# Altium PCB Array_02.PcbDoc
Units mil, origin at the board's own origin, x right, y up, seen from the top; angles counter-clockwise.
Board outline 6691.9 x 3175.2 mil, 2 copper layers (Top Layer, Bottom Layer); 36 components, 46 nets, 161 pads, 25 vias.
Unrouted connection lines stored in the file: 4.
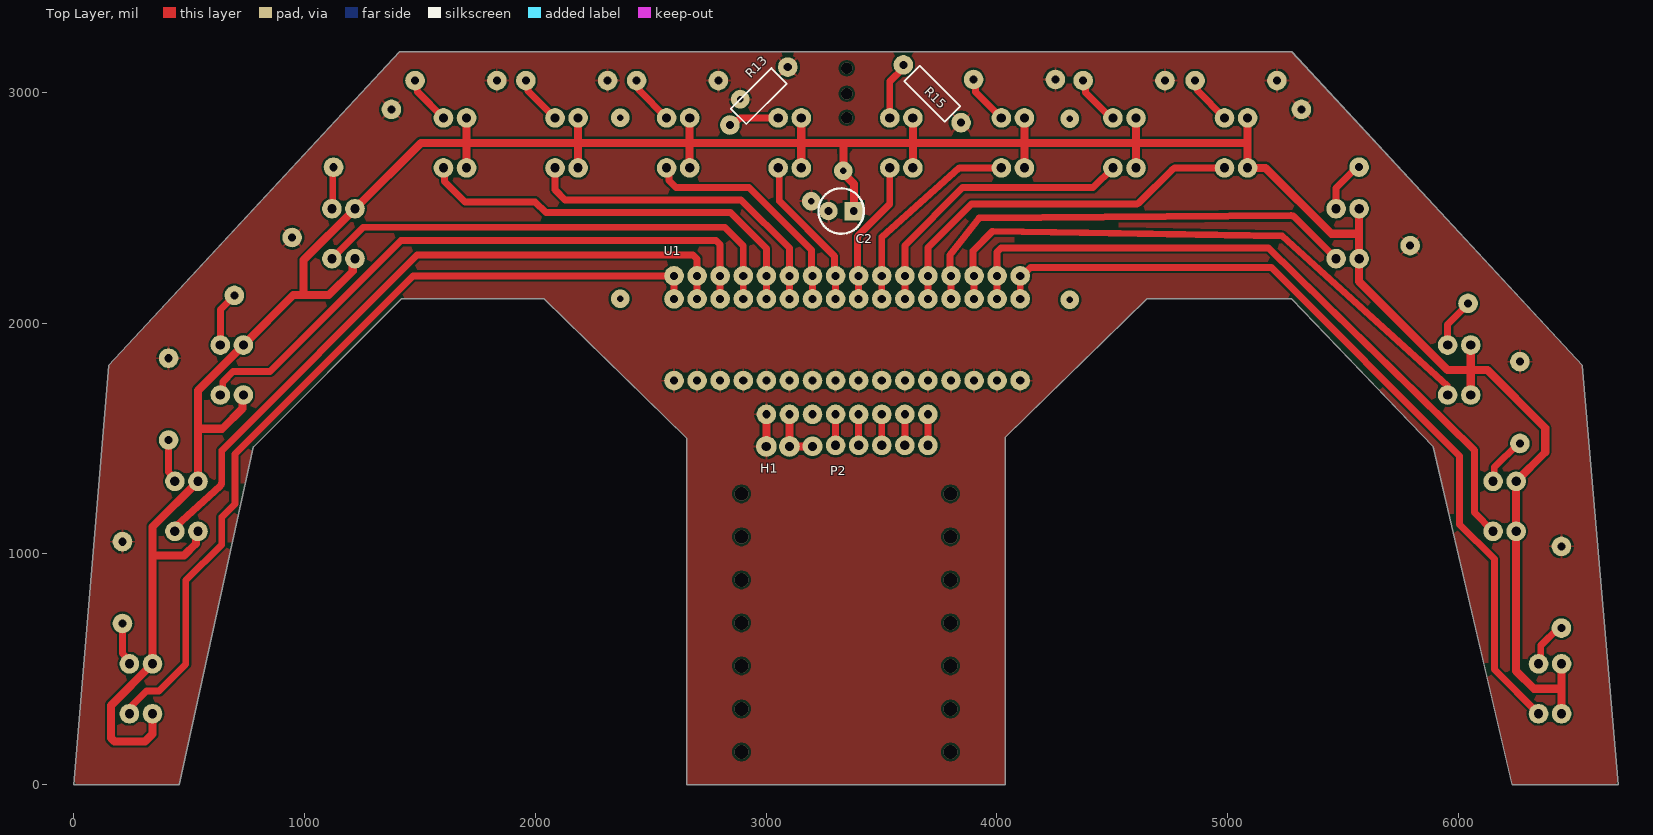
[diagram p0: Top Layer view]
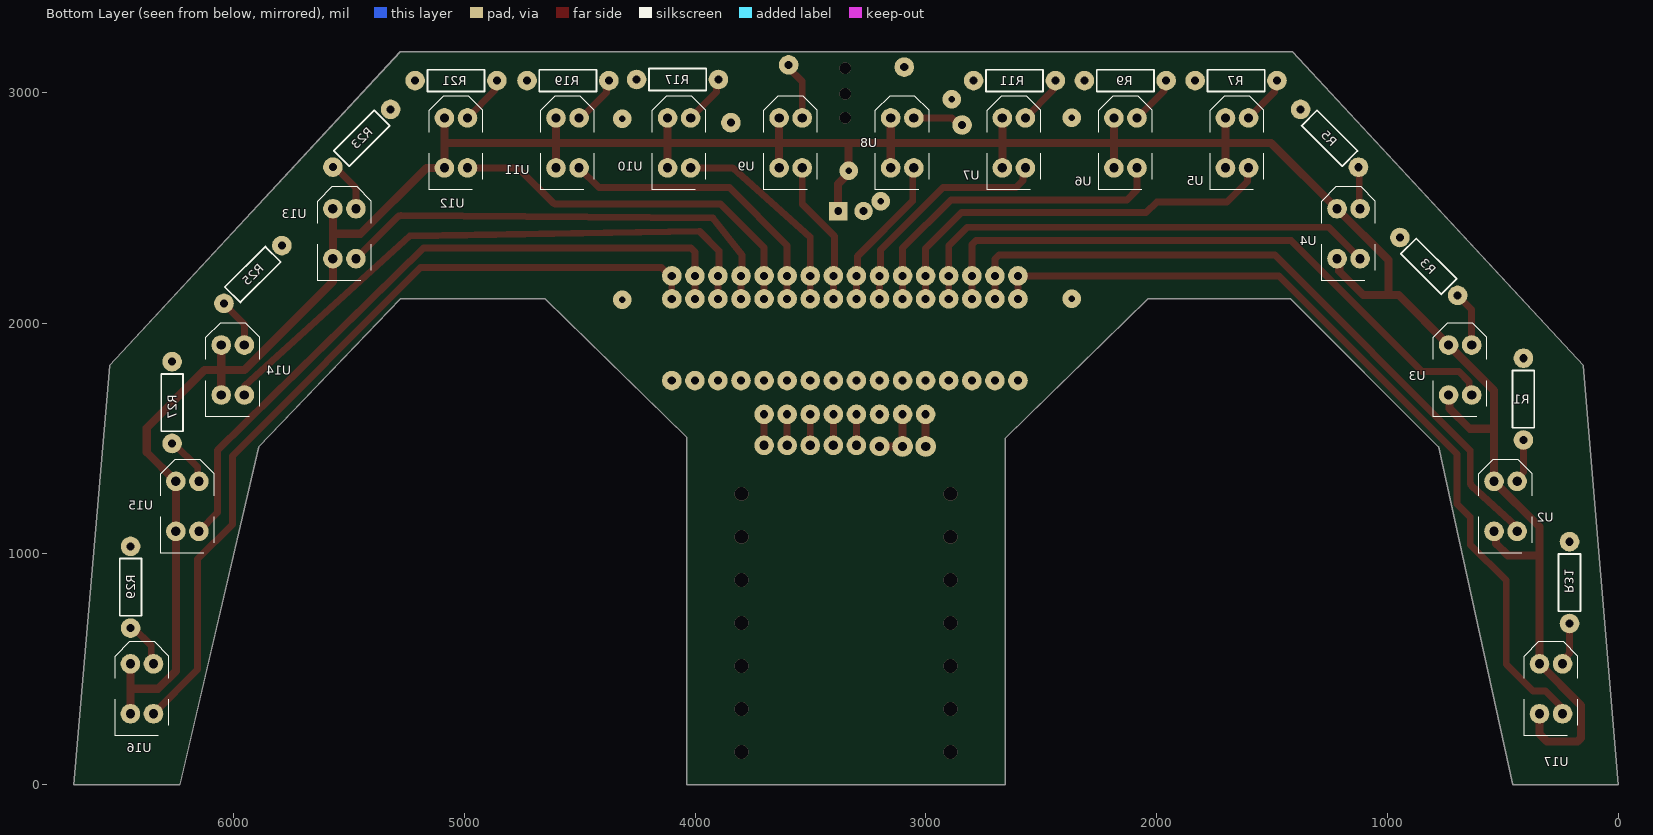
[diagram p1: Bottom Layer view, seen from below]
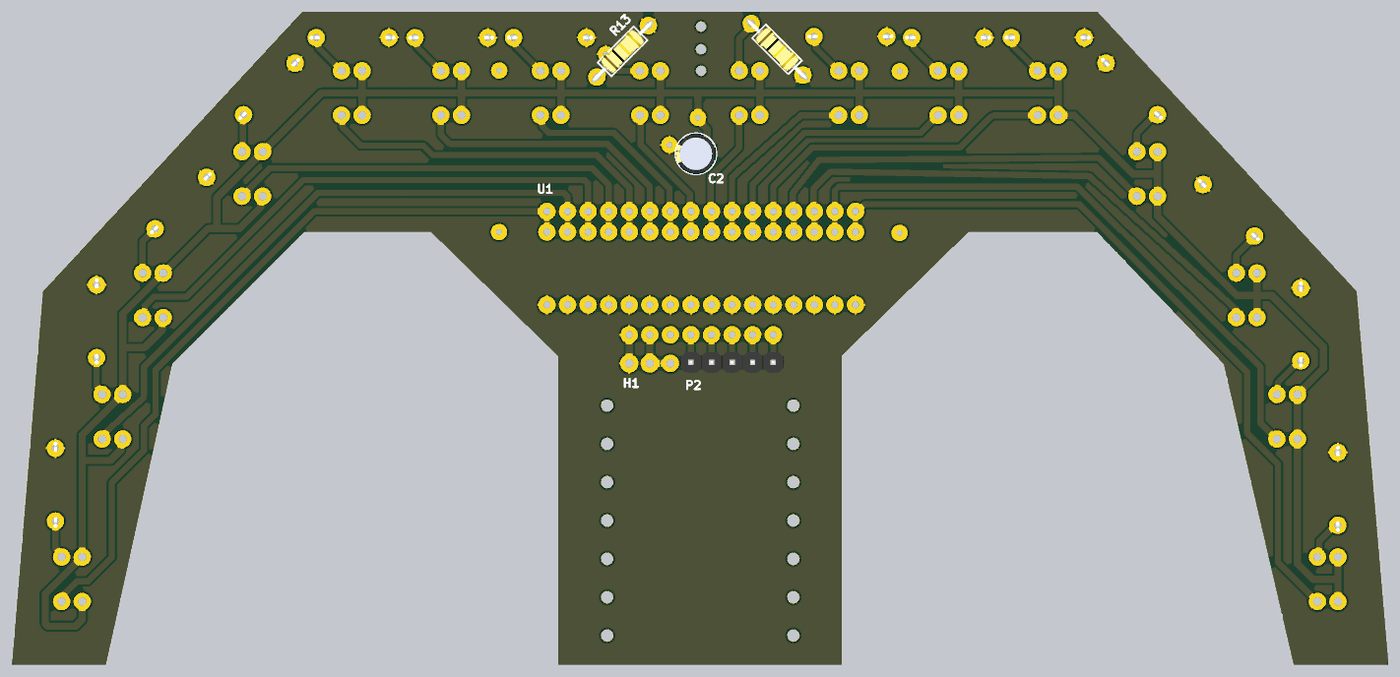
[diagram p2: 3D render of the assembled board from above, using the file's embedded part models]

## Layer stack, top to bottom
Top Solder: solder mask 0.4, Solder Resist, Dk 3.5
Top Layer: signal copper 1.4
Dielectric 1: dielectric 12.6, FR-4, Dk 4.8
Bottom Layer: signal copper 1.4
Bottom Solder: solder mask 0.4, Solder Resist, Dk 3.5

## Board outline
2655,-0.02 2655,1501.74 2037.84,2104.79 1420.37,2105.04 778.5,1463.17 456.03,-0.02 -0.01,-0.02 150.84,1815.19 1410.84,3175.19 5276.89,3175.19 6536.89,1815.19 6691.89,-0.02 6231.69,-0.02 5891.45,1463.17 5275.84,2104.96 4650.06,2104.96 4034.91,1503.87 4034.91,-0.02

## Design rules (kind name [scope] priority, off if disabled: settings)
Clearance Clearance_1 [InNamedPolygon('NONET_L01_P000')] p1: gap=10 ignorepadtopadclearanceinfootprint=FALSE
Clearance [All] p2: gap=10 ignorepadtopadclearanceinfootprint=TRUE except(15: Arc-Arc Arc-Track Track-Track)
PolygonConnect PolygonConnect_4 [All vs IsNamedPolygon('NONET_L01_P001')] p1: thpad.connectstyle=Direct thpad.reliefconductorwidth=10 thpad.reliefentries=4 thpad.polygonreliefangle="90 Angle" thpad.airgapwidth=10 smdpad.connectstyle=Direct smdpad.reliefconductorwidth=10 smdpad.reliefentries=4 smdpad.polygonreliefangle="90 Angle" smdpad.airgapwidth=10 via.connectstyle=Relief via.reliefconductorwidth=10 via.reliefentries=4 via.polygonreliefangle="90 Angle" via.airgapwidth=10
PolygonConnect PolygonConnect_3 [All vs IsNamedPolygon('NONET_L01_P000')] p2: thpad.connectstyle=Direct thpad.reliefconductorwidth=10 thpad.reliefentries=4 thpad.polygonreliefangle="90 Angle" thpad.airgapwidth=10 smdpad.connectstyle=Relief smdpad.reliefconductorwidth=10 smdpad.reliefentries=4 smdpad.polygonreliefangle="90 Angle" smdpad.airgapwidth=10 via.connectstyle=Relief via.reliefconductorwidth=10 via.reliefentries=4 via.polygonreliefangle="90 Angle" via.airgapwidth=10
PolygonConnect PolygonConnect_2 [All vs IsNamedPolygon('NONET_L-01_P-001')] p3: connectstyle=Direct reliefconductorwidth=10 reliefentries=4 polygonreliefangle="90 Angle" airgapwidth=10
PolygonConnect PolygonConnect_1 [All vs IsNamedPolygon('NONET_L01_P001')] p4: connectstyle=Direct reliefconductorwidth=10 reliefentries=4 polygonreliefangle="90 Angle" airgapwidth=10
PolygonConnect c1 [All vs IsNamedPolygon('NONET_L01_P000')] p5: connectstyle=Relief reliefconductorwidth=25 reliefentries=4 polygonreliefangle="90 Angle" airgapwidth=10
PolygonConnect [All] p6: connectstyle=Relief reliefconductorwidth=10 reliefentries=4 polygonreliefangle="90 Angle" airgapwidth=10
RoutingVias [All] p1: holewidth=28 width=50 viastyle="Through Hole" minholewidth=28 minwidth=50 maxholewidth=28 maxwidth=50
SolderMaskExpansion [All] p1: expansion=4 istentingtop=FALSE
SupplyNets "Schematic Supply Nets_3" [InNet('S VCC')] p1: voltage=0.000
SupplyNets "Schematic Supply Nets_2" [InNet('GND')] p2: voltage=0.000
SupplyNets "Schematic Supply Nets" [InNet('+5')] p3: voltage=0.000
Width [All] p1: maxlimit=60 minlimit=20 preferedwidth=35 minimp=50.000000 maximp=50.000000 favimp=50.000000
30 further rules are at their usual default settings.

## Components (designator, comment, footprint, x,y, rotation, side; value= is the part's Value field where it differs from the comment)
C2 "100uF 16V" "100uF  16V" 3325,2485 r180 top
H1 "Header 1x3" "Header 1x2 male CNC" 3100.84,1465.19 r0 top
P2 "Header 1x5" "Header 1x5 male" 3500.84,1470.19 r180 top
R1 "220" "1/4W resistor TH CNC" 410.84,1670.19 r270 bottom locked
R3 "220" "1/4W resistor TH CNC" 820.84,2245.19 r225 bottom
R5 "220" "1/4W resistor TH CNC" 1250.84,2800.19 r225 bottom locked
R7 "220" "1/4W resistor TH CNC" 1655.84,3050.19 r180 bottom locked
R9 "220" "1/4W resistor TH CNC" 2135.84,3050.19 r180 bottom locked
R11 "220" "1/4W resistor TH CNC" 2615.84,3050.19 r180 bottom locked
R13 "220" "1/4W resistor TH CNC" 2968.27,2983.29 r225 top
R15 "220" "1/4W resistor TH CNC" 3719.45,2993.14 r135 top
R17 "220" "1/4W resistor TH CNC" 4075.84,3055.19 r180 bottom locked
R19 "220" "1/4W resistor TH CNC" 4550.84,3050.19 r180 bottom locked
R21 "220" "1/4W resistor TH CNC" 5035.84,3050.19 r180 bottom locked
R23 "220" "1/4W resistor TH CNC" 5444.17,2800.46 r315 bottom
R25 "220" "1/4W resistor TH CNC" 5915.84,2210.19 r315 bottom
R27 "220" "1/4W resistor TH CNC" 6265.84,1655.19 r270 bottom
R29 "220" "1/4W resistor TH CNC" 6445.84,855.19 r270 bottom
R31 "220" "1/4W resistor TH CNC" 210.84,875.19 r270 bottom locked
U1 "16:1 Mux" "Mux 16Ch 74HC4067 Module" 3350.84,2204.52 r270 top
U2 "TCRT5000" OPTO_TCRT5000 487.96,1205.74 r90 bottom locked
U3 "TCRT5000" OPTO_TCRT5000 684.81,1796.29 r90 bottom locked
U4 "TCRT5000" OPTO_TCRT5000 1168.27,2386.84 r90 bottom locked
U5 "TCRT5000" OPTO_TCRT5000 1651.74,2780.54 r90 bottom locked
U6 "TCRT5000" OPTO_TCRT5000 2135.2,2780.54 r90 bottom locked
U7 "TCRT5000" OPTO_TCRT5000 2618.67,2780.54 r90 bottom locked
U8 "TCRT5000" OPTO_TCRT5000 3102.13,2780.54 r90 bottom locked
U9 "TCRT5000" OPTO_TCRT5000 3585.59,2780.54 r90 bottom locked
U10 "TCRT5000" OPTO_TCRT5000 4069.06,2780.54 r90 bottom locked
U11 "TCRT5000" OPTO_TCRT5000 4552.52,2780.54 r90 bottom locked
U12 "TCRT5000" OPTO_TCRT5000 5035.98,2780.54 r90 bottom locked
U13 "TCRT5000" OPTO_TCRT5000 5519.45,2386.84 r90 bottom locked
U14 "TCRT5000" OPTO_TCRT5000 6002.91,1796.29 r90 bottom locked
U15 "TCRT5000" OPTO_TCRT5000 6199.76,1205.74 r90 bottom locked
U16 "TCRT5000" OPTO_TCRT5000 6396.61,415.19 r90 bottom locked
U17 "TCRT5000" OPTO_TCRT5000 291.11,415.19 r90 bottom locked

## Footprints (in the part's own frame and the unit in brackets; to place one, negate y for a bottom-side part, rotate by r counter-clockwise, add the part's x,y. Pads: shape width x height; smd on the part's side, far side on the other; paste and mask are expansions set on the pad)
"1/4W resistor TH CNC" [mil] "Axial Resistor, 2-Leads, Dia 2.4mm, Body Length 6.3mm"
  round 85 hole 35: 1(-177.17,0) 2(177.17,0)
  silkscreen extent -124,-47 124,47, body extent -210,-48 210,47, height 97
"100uF  16V" [mil] "100uF  16V"
  rect 80x80 hole 33.46: P(-55,0)
  round 80 hole 33.46: ""(55,0)
  silkscreen extent -98,-98 98,98, body extent -110,-100 110,100, height 461
"Header 1x2 male CNC" [mil]
  round 90 hole 40: 1(-100,0) 2(0,0)
"Header 1x5 male" [mil]
  round 85 hole 40: 1(-200,0) 2(-100,0) 3(0,0) 4(100,0) 5(200,0)
  body extent -250,-50 250,50, height 339
"Mux 16Ch 74HC4067 Module" [mil]
  round 85 hole 35 mask+4: 1(0,750) 1(100,750) 2(0,650) 2(100,650) 3(0,550) 3(100,550) 4(0,450) 4(100,450) 5(0,350) 5(100,350) 6(0,250) 6(100,250) 7(0,150) 7(100,150) 8(0,50) 8(100,50) 9(0,-50) 9(100,-50) 10(0,-150) 10(100,-150) 11(0,-250) 11(100,-250) 12(0,-350) 12(100,-350) 13(0,-450) 13(100,-450) 14(0,-550) 14(100,-550) 15(0,-650) 15(100,-650) 16(0,-750) 16(100,-750) 17(454.33,550) 17(454.33,650) 17(454.33,750) 17(454.33,250) 17(454.33,350) 17(454.33,450) 17(454.33,-150) 17(454.33,-50) 17(454.33,50) 17(454.33,150) 17(454.33,-450) 17(454.33,-350) 17(454.33,-250) 17(454.33,-750) 17(454.33,-650) 17(454.33,-550) 17(600,-350) 18(600,-250) 19(600,-150) 20(600,-50) 21(600,50) 22(600,150) 23(600,250) 24(600,350)
OPTO_TCRT5000 [mil]
  round 85 hole 40: A(108.27,50) CATH(108.27,-50) COLL(-108.27,50) E(-108.27,-50)
  silkscreen extent -203,-116 203,116

## Part data
C2: "CAP ALUM 100uF 16V RADIAL TH", Package="RADIAL-2 Panasonic", Availability="In Stock", Check_prices=https://www.snapeda.com/parts/EEU-FR1E221B/Panasonic/view-part/?ref=eda, MF="Panasonic Electronic Components", MP=EEU-FR1E221B, Price=None, Purchase-URL=https://pricing.snapeda.com/search/part/EEU-FR1E221B/?ref=eda, SnapEDA_Link=https://www.snapeda.com/parts/EEU-FR1E221B/Panasonic/view-part/?ref=snap
H1: library part "Header 1x2"
R1 R3 R5 R7 R9 R11 R13 R15 R17 R19 R21 R23 R25 R27 R29 R31: library part "reg 220 th", "Axial Resistor,reg 220 th", Case\Package=Axial, Max Operating Temperature="155 degC", Min Operating Temperature="-55 degC", Package Quantity=200, Power Rating="250 mW", Resistance="1 kohm", Tolerance=1%, Voltage Rating="250 V", ComponentLink1Description="Manufacturer URL", ComponentLink1URL=http://www.yageo.com/, ComponentLink2Description=Datasheet, ComponentLink2URL=http://www.yageo.com/documents/recent/Yageo%20LR_MFR_2013.pdf, DatasheetVersion=Apr-13, Length="0.248 inch", PackageDescription="2-Pin Axial Lead, Dia 2.4 mm, Body Length 6.3 mm", PackageReference=MFR-25, Packaging=Bulk, RoHSCompliant=true
U1: library part "Mux 16Ch 74HC4067 Module"
U2 U3 U4 U5 U6 U7 U8 U9 U10 U11 U12 U13 U14 U15 U16 U17: "950 nm 60 mA Through Hole Reflective Optical Sensor with Transistor Output", Package=None, Availability=Unavailable, MP=TCRT5000, Price=None

## Via types
v1: diameter 60, hole 60, Top Layer to Bottom Layer, 14 vias
v2: diameter 80, hole 28, Top Layer to Bottom Layer, 7 vias
v3: diameter 50, hole 50, Top Layer to Bottom Layer, 3 vias
v4: diameter 85, hole 40, Top Layer to Bottom Layer, 1 vias

## Nets (pads, with @x,y where several pads share a name; then routed paths per layer and width w, separated by ;. In a path a pad name is that pad's centre, name@x,y a point inside that pad or via, vN(x,y) a via of type N, cw(c..) or ccw(c..) an arc to the next point about the centre after c; other vN are vias at no path point)
+5: C2.P H1.2 U1.18 U2.A U2.COLL U3.A U3.COLL U4.A U4.COLL U5.A U5.COLL U6.A U6.COLL U7.A U7.COLL U8.A U8.COLL U9.A U9.COLL U10.A U10.COLL U11.A U11.COLL U12.A U12.COLL U13.A U13.COLL U14.A U14.COLL U15.A U15.COLL U16.A U16.COLL U17.A U17.COLL | length 13926.4
  Top Layer w35: U17.COLL 341.11,219.91 307.91,186.71 175.76,186.71 161.11,201.36 161.11,343.45 U17.A 341.11,1117.15 U2.A 537.96,1541.94 ; 354.1,993.14 478.12,993.14 528.64,1043.66 528.64,1088.14 U2.COLL ; U3.COLL 730.41,1683.62 730.41,1629.29 643.07,1541.94 537.96,1541.94 ; U4.COLL 1208.71,2269 1208.71,2224.51 1104.77,2120.58 995.84,2120.58 ; U5.COLL 1701.74,2780.54 ; U5.A 1701.74,2780.54 ; U6.COLL 2185.2,2780.54 ; U6.A 2185.2,2780.54 ; U7.COLL 2668.67,2780.54 ; U7.A 2668.67,2780.54 ; U1.18 H1.2 v4(3200.84,1465.19) ; U8.COLL 3152.13,2780.54 ; U8.A 3152.13,2780.54 ; C2.P 3380,2602.86 3334.95,2647.92 v2(3334.95,2660.09) 3334.95,2734.59 3334.45,2735.09 3334.45,2780.54 ; U9.COLL 3635.59,2780.54 ; U9.A 3635.59,2780.54 ; U10.COLL 4119.06,2780.54 ; U10.A 4119.06,2780.54 ; U11.COLL 4602.52,2780.54 ; U11.A 4602.52,2780.54 ; U12.A 5085.98,2780.54 ; U13.A 5569.45,2386.84 ; U14.COLL 6052.91,1796.29 ; U14.A 6052.91,1796.29 ; U16.COLL 6446.61,415.19 ; U16.A 6446.61,415.19 ; 537.96,1541.94 537.96,1707.7 U3.A 950.84,2120.58 995.84,2120.58 ; 995.84,2120.58 995.84,2272.67 U4.A 1503.71,2780.54 1701.74,2780.54 ; 1701.74,2780.54 2185.2,2780.54 ; 2185.2,2780.54 2668.67,2780.54 ; 2668.67,2780.54 3152.13,2780.54 ; 3152.13,2780.54 3334.45,2780.54 ; 3334.45,2780.54 3635.59,2780.54 ; 3635.59,2780.54 4119.06,2780.54 ; 4119.06,2780.54 4602.52,2780.54 ; 4602.52,2780.54 5085.98,2780.54 ; 5085.98,2780.54 U12.COLL 5163.94,2672.27 5449.37,2386.84 5569.45,2386.84 ; 5569.45,2386.84 U13.COLL 5569.45,2179.75 5952.91,1796.29 6052.91,1796.29 ; 6052.91,1796.29 6124.74,1796.29 6375.73,1545.29 6375.73,1439.98 U15.A U15.COLL 6249.76,491.96 6326.53,415.19 6446.61,415.19
E1: 
E2: 
E3: 
GND: C2. H1.1 R1.1 R3.1 R5.1 R7.1 R9.1 R11.1 R13.1 R15.1 R17.1 R19.1 R21.1 R23.1 R25.1 R27.1 R29.1 R31.1 U1.17 | length 139.3
  Top Layer w35: H1.1 U1.17@3000.84,1604.52
  other v2: 3195.84,2528.16 2887.54,2969.37
IR_00: U1.16 U17.E | length 3669.7
  Top Layer w30: U17.E 251.63,317.44 251.63,342.5 314.31,405.17 368.89,405.17 485,521.28 485,884.56 641.28,1040.84 641.28,1159.67 697.91,1216.3 697.91,1432.91 1469.52,2204.52 2600.84,2204.52 U1.16@2600.84,2104.52
IR_01: U1.15 U2.E | length 3002.5
  Top Layer w30: U2.E@445.55,1121.59 633.13,1292.16 ; 633.13,1292.17 ccw(c616.28,1310.63) 641.28,1310.63 641.28,1448.4 1487.88,2295 2683.26,2295 2700.84,2277.43 2700.84,2204.52 U1.15@2700.84,2104.52
IR_02: U1.14 U3.E | length 2712.5
  Top Layer w30: U3.E 645.33,1698.54 645.33,1732.87 645.55,1733.09 645.55,1745.55 690,1790 850,1790 1416.87,2356.87 2783.26,2356.87 2800.84,2339.3 2800.84,2204.52 U1.14@2800.84,2104.52
IR_03: U1.13 U4.E | length 2102.4
  Top Layer w30: U4.E 1254.7,2415 2820.36,2415 2900.84,2334.52 2900.84,2204.52 U1.13@2900.84,2104.52
IR_04: U1.12 U5.E | length 1793.7
  Top Layer w30: U5.E 1606.44,2667.56 1606.44,2613.23 1694.68,2525 1999.34,2525 2045.73,2478.61 2844.66,2478.61 3000.84,2322.43 3000.84,2204.52 U1.12@3000.84,2104.52
IR_05: U1.11 U6.E | length 1410.2
  Top Layer w30: U6.E 2085.2,2577.37 2129.13,2533.44 2891.56,2533.44 3100.84,2324.16 3100.84,2229.92 U1.11@3100.43,2229.52 ; U1.11@3100.84,2104.52 U1.11@3100.84,2204.52
IR_06: U1.10 U7.E | length 987.5
  Top Layer w30: U7.E 2578.29,2662.64 2578.29,2618.15 2609.23,2587.22 2924.91,2587.22 3195.84,2316.29 U1.10@3195.84,2229.52 ; U1.10@3200.84,2104.52 U1.10@3200.84,2204.52
IR_07: U1.9 U8.E | length 643.7
  Top Layer w30: U8.E 3056.84,2667.56 3056.84,2528.16 3295.84,2289.16 U1.9@3295.84,2229.52 ; U1.9@3300.84,2104.52 U1.9@3300.84,2204.52
IR_08: U1.8 U9.E | length 600.6
  Top Layer w30: U1.8@3395.84,2229.52 3395.84,2375.84 3535.59,2515.59 U9.E ; U1.8@3400.84,2104.52 U1.8@3400.84,2204.52
IR_09: U1.7 U10.E | length 900.3
  Top Layer w30: U1.7@3500.84,2104.52 3500.84,2204.52 3500.84,2371.99 3837.09,2672.27 U10.E
IR_10: U1.6 U11.E | length 1272.7
  Top Layer w30: U1.6@3600.84,2104.52 3600.84,2204.52 3600.84,2336.37 3851.04,2586.57 4416.82,2586.57 U11.E
IR_11: U1.5 U12.E | length 1647.8
  Top Layer w30: U1.5@3700.84,2104.52 3700.84,2204.52 3700.84,2326.63 3889.2,2515 4597.57,2515 ccw(c4597.57,2545) 4618.76,2523.76 4758.51,2663.51 cw(c4779.7,2642.27) 4779.7,2672.27 U12.E
IR_12: U1.4 U13.E | length 1992.5
  Top Layer w30: U1.4@3795.84,2229.52 3795.84,2293.75 3922.81,2454.98 5274.62,2464.96 cw(c5274.77,2444.96) 5288.84,2459.18 5288.87,2459.14 U13.E ; U1.4@3800.84,2104.52 U1.4@3800.84,2204.52
IR_13: U1.3 U14.E | length 2564.4
  Top Layer w30: U1.3@3895.84,2229.52 3895.84,2286.73 3895.84,2312.94 3980.46,2397.56 5236.28,2376.66 5950.94,1728.4 U14.E ; U1.3@3900.84,2104.52 U1.3@3900.84,2204.52
IR_14: U1.2 U15.E | length 3021.5
  Top Layer w30: U1.2@4000.84,2104.52 4000.84,2204.52 4000.84,2307.43 4018.41,2325 5177.3,2325 6069.04,1448.66 6069.04,1178.19 U15.E
IR_15: U1.1 U16.E | length 3615.4
  Top Layer w30: U1.1@4100.84,2104.52 4100.84,2204.52 4110.43,2204.52 4145.91,2240 5188.95,2240 6005,1423.95 6005,1126.88 6155,976.88 6155,498.53 U16.E
NetR1_2: R1.2 U2.CATH | length 190.3
  Top Layer w30: R1.2 410.84,1354.66 437.96,1327.53 U2.CATH
NetR3_2: R3.2 U3.CATH | length 240.5
  Top Layer w30: U3.CATH 634.81,2059.16 R3.2
NetR5_2: R5.2 U4.CATH | length 182.8
  Top Layer w30: U4.CATH 1121.92,2498.75 1121.92,2671.27 R5.2
NetR7_2: R7.2 U5.CATH | length 212.4
  Top Layer w30: R7.2 1488.24,3040.62 1488.24,3002.3 U5.CATH
NetR9_2: R9.2 U6.CATH | length 213.8
  Top Layer w30: R9.2 1968.24,3040.62 1968.24,3005.77 U6.CATH
NetR11_2: R11.2 U7.CATH | length 215.2
  Top Layer w30: R11.2 2448.24,3040.62 2448.24,3009.23 U7.CATH
NetR13_2: R13.2 U8.CATH | length 221.9
  Top Layer w30: R13.2 2856.53,2858.02 2887.31,2888.8 U8.CATH
NetR15_2: R15.2 U9.CATH | length 253.9
  Top Layer w30: U9.CATH 3535.59,3046.3 3594.18,3104.88 R15.2
NetR17_2: R17.2 U10.CATH | length 216.2
  Top Layer w30: R17.2 3907.85,3046.01 3907.85,3000.01 U10.CATH
NetR19_2: R19.2 U11.CATH | length 220
  Top Layer w30: R19.2 4383.24,3040.62 4383.24,2999.15 4493.59,2888.8 U11.CATH
NetR21_2: R21.2 U12.CATH | length 214.1
  Top Layer w30: R21.2 4868.24,3040.62 4868.24,3006.55 U12.CATH
NetR23_2: R23.2 U13.CATH | length 226.9
  Top Layer w30: U13.CATH 5469.45,2584.47 5560.16,2675.19 R23.2
NetR25_2: R25.2 U14.CATH | length 216.9
  Top Layer w30: U14.CATH 5952.91,1993.92 6041.11,2082.12 R25.2
NetR27_2: R27.2 U15.CATH | length 216.1
  Top Layer w30: U15.CATH 6154.58,1318.83 6154.58,1373.53 6259.07,1478.02 R27.2
NetR29_2: R29.2 U16.CATH | length 203.6
  Top Layer w30: U16.CATH 6356.18,533.02 6356.18,601.89 6432.31,678.02 R29.2
NetR31_2: R31.2 U17.CATH | length 187.1
  Top Layer w30: R31.2 210.84,567.26 241.11,536.98 U17.CATH
S0: P2.5 U1.20 | length 134.3
  Top Layer w30: P2.5 U1.20
S1: P2.4 U1.21 | length 134.3
  Top Layer w30: P2.4 U1.21
S2: P2.3 U1.22 | length 134.3
  Top Layer w30: P2.3 U1.22
S3: P2.2 U1.23 | length 134.3
  Top Layer w30: P2.2 U1.23
"S VCC": 
SIG: P2.1 U1.24 | length 134.3
  Top Layer w30: P2.1 U1.24
T1: 
T2: 
T3: 
pads on no net: U1.19
copper on no net:
  other v1: 2893.19,141.43 3798.7,141.43 2893.19,327.86 3798.7,327.86 2893.19,514.29 3798.7,514.29 2893.19,700.71 3798.7,700.71 2893.19,887.14 3798.7,887.14 2893.19,1073.57 3798.7,1073.57 2893.19,1260 3798.7,1260
  other v2: 4315,2100 2367.52,2104.34 4316.15,2885.91 2368.66,2890.24
  other v3: 3349.88,2888.8 3349.81,2993.14 3349.74,3103.79

## Polygon pours and split planes (outlines as drawn)
GND on Top Layer "GND_L01_P001" (solid, pour order 1): 2655,-0.02 2655,1501.74 2037.84,2104.79 1420.37,2105.04 778.5,1463.17 456.03,-0.02 -0.01,-0.02 150.84,1815.19 1410.84,3175.19 5276.89,3175.19 6536.89,1815.19 6691.89,-0.02 6231.69,-0.02 5891.45,1463.17 5275.84,2104.96 4650.06,2104.96 4034.91,1503.87 4034.91,-0.02

## Silkscreen, mask and mechanical layers (free items; w line width, h text height)
Mechanical 1:
  lines w5: 780.84,2495.19 1410.84,3175.19 ; 2037.78,2104.79 2495.82,1657.25 2654.74,1498.33 2654.75,948.44 ; 2037.91,2104.73 1420.38,2105.04 778.5,1463.16 456.04,-0.02 0,0 150.83,1815.18 1410.83,3175.19 ; 3345.94,0 3345.94,3171.43 ; 4034.91,310.72 4034.91,1500.28 4191.89,1657.26 4650.05,2104.96 5275.86,2104.97 5891.45,1463.17 6231.69,-0.02 6536.89,-0.02 6536.89,1815.18 5276.89,3175.19 1410.83,3175.19 ; 4035,2.84 4035,106.42 4035,313.58 ; 4191.89,-0.02 2655.37,-0.02 2655.36,573.83 2655.36,708.18 2654.75,708.79 2654.75,948.44 ; 5286.89,3175.19 1410.84,3175.19 ; 6219.92,-0.02 6691.89,-0.02 ; 2654.75,948.44 2654.75,948.44
  lines w10: 1420.84,2105.19 5275.84,2105.19 5275.84,3175.19 1420.84,3175.19 1420.84,2105.19 ; 2655,0 4034.91,0 4034.91,1700.19 2655,1700.19 2655,0

## Dimensions
778.5,1463.16 to 2654.74,1498.33 on Mechanical 1
4035,106.42 to 2655.37,-0.02 on Mechanical 1
0,0 to 6691.89,-0.02 on Mechanical 1
3345.94,3171.43 to 2893.19,141.43 on Mechanical 1
2893.19,514.29 to 2893.19,327.86 on Mechanical 1
3798.7,141.43 to 3345.94,3171.43 on Mechanical 1
6219.92,-0.02 to 6691.89,-0.02 on Mechanical 1
5891.45,-139.81 to 6219.92,-0.02 on Mechanical 1
4034.91,310.72 to 4650.05,-139.81 on Mechanical 1
4650.05,2104.96 to 5275.86,2104.97 on Mechanical 1
2655,1501.74 to 1420.84,2105.19 on Mechanical 1
4034.91,1503.87 to 4191.89,-0.02 on Mechanical 1
5299.39,3175.19 to 5891.45,1463.17 on Mechanical 1
5286.89,3175.19 to 6536.89,1815.19 on Mechanical 1
5275.84,3175.19 to 5275.84,2105.19 on Mechanical 1
1420.84,3175.19 to 5275.84,3175.19 on Mechanical 1
1410.84,3175.19 to -0.01,-0.02 on Mechanical 1